# EAGLE board RGB_controller_2zone_v1.00_printable (EAGLE 8.1.0)
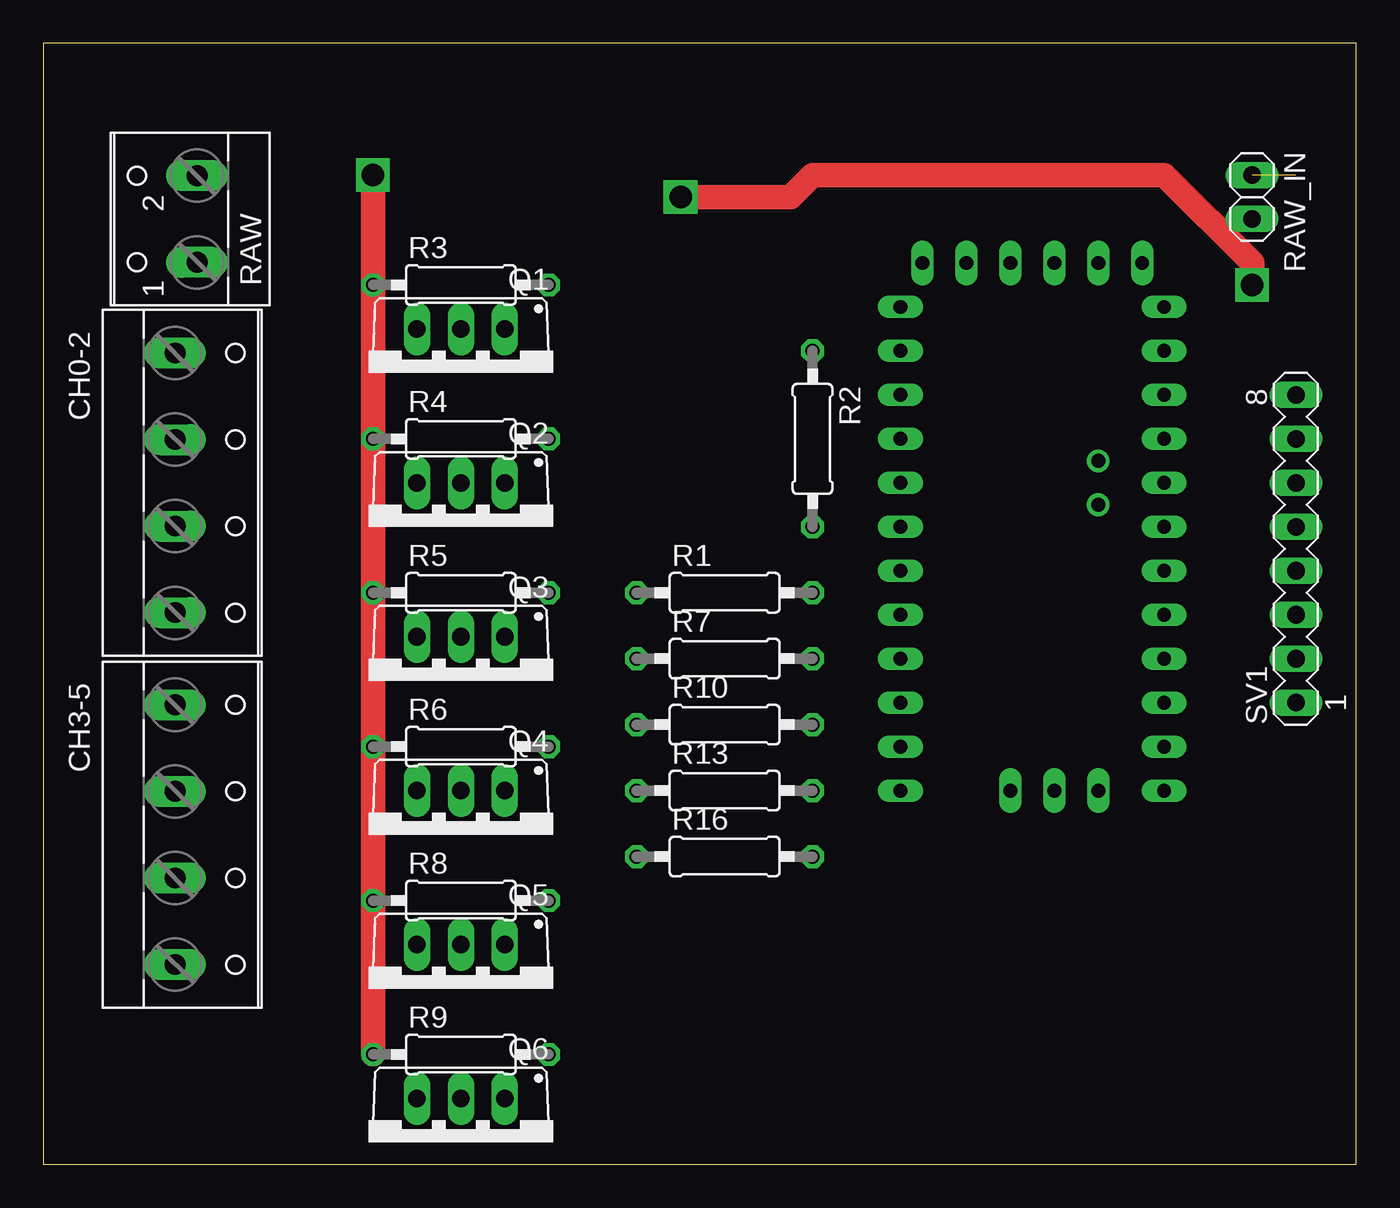
[diagram p0: board, top side]
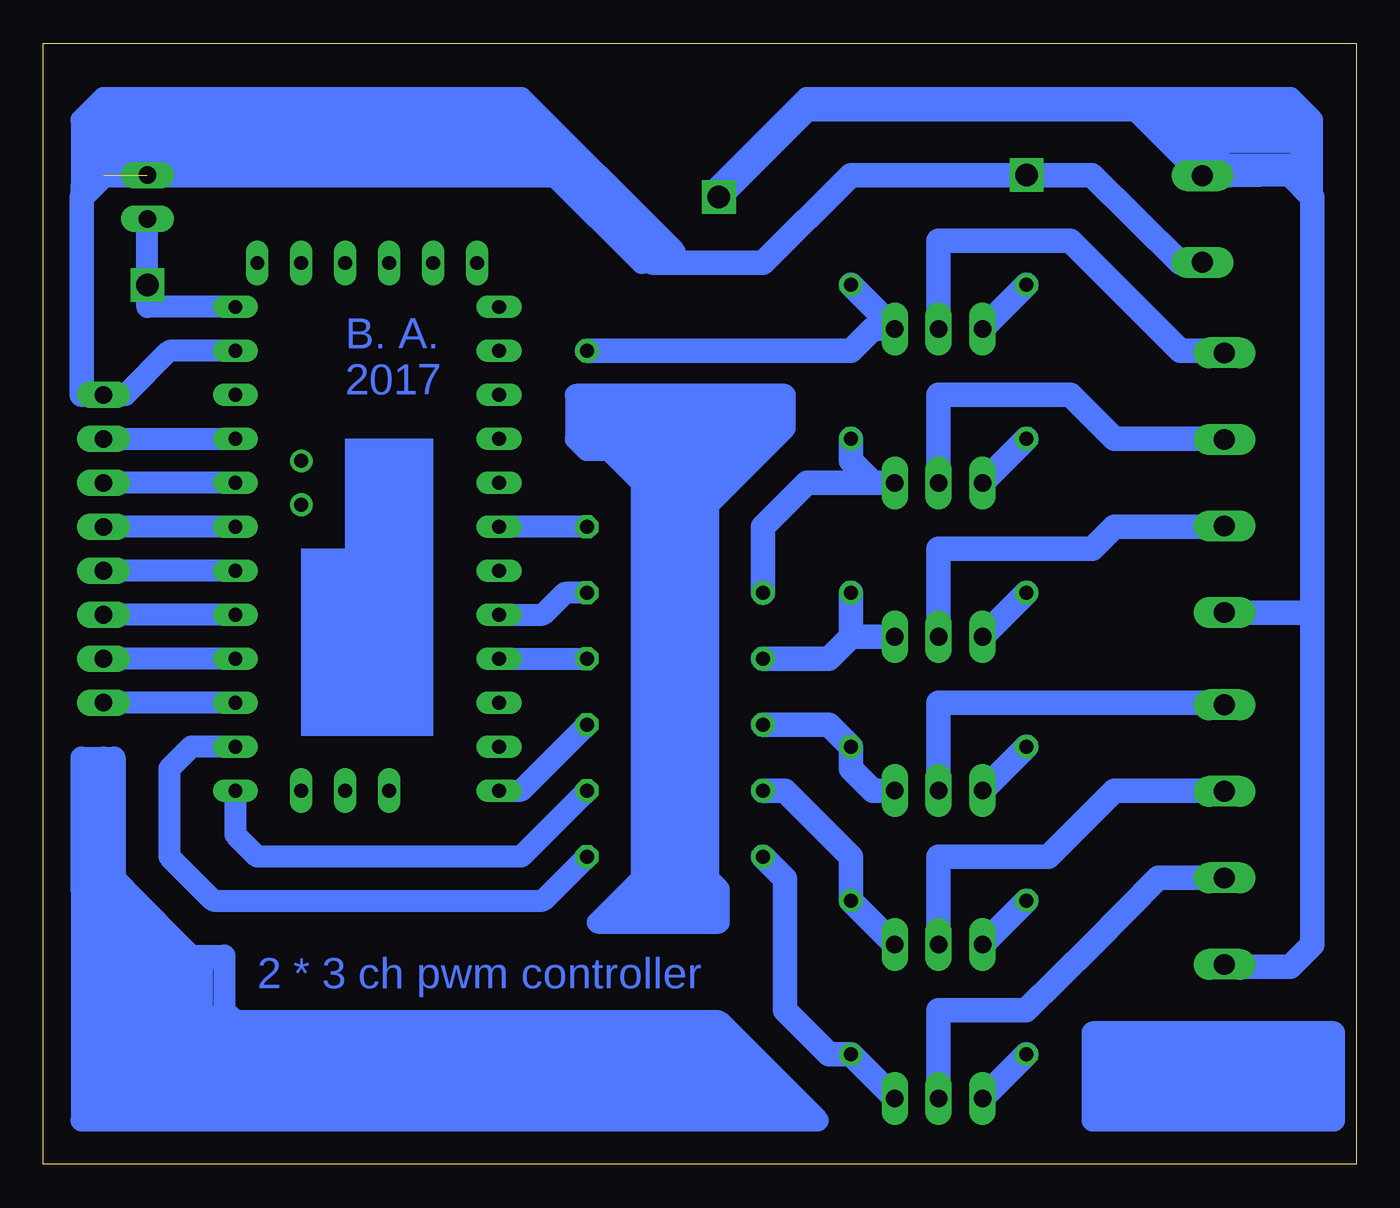
[diagram p1: board, bottom side, seen from below]

Size 75.87 x 64.76 mm. Coordinates in mm from the lower left corner, seen from the top.
Outline: 0,0 75.87,0 75.87,64.76 0,64.76 0,0
Copper layers (1*16): Top 0.035mm / dielectric 1.5mm / Bottom 0.035mm
Design rules "default": minimum track width 10mil, minimum drill 24mil, track to track 8mil, track to pad 8mil, pad to pad 8mil, via to via 8mil, smd to smd 8mil, copper to edge 40mil, drill to drill 8mil, minimum pad ring 10mil, minimum via ring 8mil, stop-mask expansion 4mil, vias tented up to drill 0mil, thermal gap 10mil

## Footprints (pad centres in the part's own frame; a part is rotated, then mirrored left to right if it is on the bottom)
W237-4 = drill 1.194 long: 1 -7.5,-1.27; 2 -2.5,-1.27; 3 2.5,-1.27; 4 7.5,-1.27
TO220BV = drill 1.016 long: D 0,-2.54; G -2.54,-2.54; S 2.54,-2.54
0207/10 = drill 0.813 octagon: 1 -5.08,0; 2 5.08,0
W237-102 = drill 1.194 long: 1 -2.5,-1.27; 2 2.5,-1.27
1X02 = drill 1.016 long: 1 -1.27,0; 2 1.27,0
MA08-1 = drill 1.016 long: 1 -8.89,0; 2 -6.35,0; 3 -3.81,0; 4 -1.27,0; 5 1.27,0; 6 3.81,0; 7 6.35,0; 8 8.89,0
ABK-PRO-MINI = drill 0.8 long: A0 10.16,-3.81; A1 10.16,-6.35; A2 10.16,-8.89; A3 10.16,-11.43; A6 3.81,-21.59; A7 6.35,-21.59; D2 -5.08,-3.81; D3 -5.08,-6.35; D4 -5.08,-8.89; D5 -5.08,-11.43; D6 -5.08,-13.97; D7 -5.08,-16.51; D8 -5.08,-19.05; D9 -5.08,-21.59; D10 10.16,-21.59; D11 10.16,-19.05; D12 10.16,-16.51; D13 10.16,-13.97; DTR 8.89,8.89; GND 10.16,3.81; GND1 -5.08,-1.27; GND2 -3.81,8.89; GND3 -1.27,8.89; GND4 1.27,-21.59; RAW 10.16,6.35; RST 10.16,1.27; RST1 -5.08,1.27; RX1 -5.08,3.81; RX1-1 3.81,8.89; TX0 -5.08,6.35; TX0-1 6.35,8.89; VCC 10.16,-1.27; VCC1 1.27,8.89 | drill 0.8: A4 6.35,-5.08; A5 6.35,-2.54

## Placement (x,y rotation side)
CH0-2  [W237-4]  8.89,39.37 270 top
CH3-5  [W237-4]  8.89,19.05 270 top
Q1  IRF512  [TO220BV]  24.13,45.72 180 top
Q2  IRF512  [TO220BV]  24.13,36.83 180 top
Q3  IRF512  [TO220BV]  24.13,27.94 180 top
Q4  IRF512  [TO220BV]  24.13,19.05 180 top
Q5  IRF512  [TO220BV]  24.13,10.16 180 top
Q6  IRF512  [TO220BV]  24.13,1.27 180 top
R1  1k  [0207/10]  39.37,33.02 0 top
R2  1k  [0207/10]  44.45,41.91 270 top
R3  10k  [0207/10]  24.13,50.8 0 top
R4  10k  [0207/10]  24.13,41.91 0 top
R5  10k  [0207/10]  24.13,33.02 0 top
R6  10k  [0207/10]  24.13,24.13 0 top
R7  1k  [0207/10]  39.37,29.21 0 top
R8  10k  [0207/10]  24.13,15.24 0 top
R9  10k  [0207/10]  24.13,6.35 0 top
R10  1k  [0207/10]  39.37,25.4 0 top
R13  1k  [0207/10]  39.37,21.59 0 top
R16  1k  [0207/10]  39.37,17.78 0 top
RAW  [W237-102]  7.62,54.61 90 top
RAW_IN  [1X02]  69.85,55.88 270 top
SV1  [MA08-1]  72.39,35.56 90 top
U$1  ABK-PRO-MINI  [ABK-PRO-MINI]  54.61,43.18 0 top

## Library data of the parts
CH0-2 CH3-5 = con-wago-500; OC_FARNELL: unknown; OC_NEWARK: unknown
Q1-Q6 = transistor-power
R1-R10 R13 R16 = rcl
RAW = con-wago-500; MPN: 237-102; OC_FARNELL: unknown; OC_NEWARK: 70K9898
RAW_IN = pinhead
SV1 = con-lstb; OC_FARNELL: unknown; OC_NEWARK: unknown
U$1 = Arduino-clone

## Nets
+12V: CH0-2.4 CH3-5.4 RAW.2 RAW_IN.2 U$1.RAW
A0: SV1.6 U$1.A0
A1: SV1.5 U$1.A1
A2: SV1.4 U$1.A2
A3: SV1.3 U$1.A3
D12: SV1.1 U$1.D12
D13: SV1.2 U$1.D13
GATE_1: Q1.G R2.1 R3.2
GATE_2: Q2.G R1.1 R4.2
GATE_3: Q3.G R5.2 R7.1
GATE_4: Q4.G R6.2 R10.1
GATE_5: Q5.G R8.2 R13.1
GATE_6: Q6.G R9.2 R16.1
GND: Q1.S Q2.S Q3.S Q4.S Q5.S Q6.S R3.1 R4.1 R5.1 R6.1 R8.1 R9.1 RAW.1 RAW_IN.1 SV1.8 U$1.GND
IC_PWM_OUT_0: R2.2 U$1.D3
IC_PWM_OUT_1: R1.2 U$1.D5
IC_PWM_OUT_2: R7.2 U$1.D6
IC_PWM_OUT_3: R10.2 U$1.D9
IC_PWM_OUT_4: R13.2 U$1.D10
IC_PWM_OUT_5: R16.2 U$1.D11
OUTPUT_0: CH0-2.1 Q1.D
OUTPUT_1: CH0-2.2 Q2.D
OUTPUT_2: CH0-2.3 Q3.D
OUTPUT_3: CH3-5.1 Q4.D
OUTPUT_4: CH3-5.2 Q5.D
OUTPUT_5: CH3-5.3 Q6.D
VCC: SV1.7 U$1.VCC

## Tracks (layer width: path | path; a pad name or v marks a point on that pad's centre or on a via)
+12V  (via drill 1.3)
  Top 1.422: v36.83,55.88 43.18,55.88 44.45,57.15 64.77,57.15 69.85,52.07 v69.85,50.8
  Bottom 1.27: RAW_IN.2 v69.85,50.8 69.85,49.53 U$1.RAW | 2.54,55.88 2.54,60.33 3.81,61.59 31.75,61.59 36.83,56.52 36.2,56.52 31.75,60.96 10.79,60.96 10.16,60.33 | 10.16,60.33 7.62,57.78 3.17,57.78 3.17,59.69 4.45,60.96 9.53,60.96 10.16,60.33 | 10.16,60.33 5.08,60.33 3.81,59.05 6.99,59.05 | 6.99,59.05 8.26,59.05 8.89,59.69 7.62,59.69 6.99,59.05
  Bottom 1.422: 2.54,31.75 2.54,55.88 3.85,57.19 RAW.2 8.89,57.15 12.7,60.96 31.75,60.96 v36.83,55.88 | 2.54,31.75 2.54,12.7 3.81,11.43 7.5,11.43 CH3-5.4 | CH0-2.4 2.66,31.87 2.54,31.75
A0
  Bottom 1.27: U$1.A0 SV1.6
A1
  Bottom 1.27: U$1.A1 SV1.5
A2
  Bottom 1.27: U$1.A2 SV1.4
A3
  Bottom 1.27: U$1.A3 SV1.3
D12
  Bottom 1.27: U$1.D12 SV1.1
D13
  Bottom 1.27: U$1.D13 SV1.2
GATE_1
  Bottom 1.422: R3.2 Q1.G 27.94,48.26 29.21,46.99 R2.1
GATE_2
  Bottom 1.422: R4.2 29.21,40.64 27.94,39.37 | 27.94,39.37 Q2.G | R1.1 34.29,36.83 31.75,39.37 27.94,39.37
GATE_3
  Bottom 1.422: R7.1 30.48,29.21 29.21,30.48 | 29.21,30.48 Q3.G | R5.2 29.21,30.48
GATE_4
  Bottom 1.422: R10.1 30.48,25.4 R6.2 29.21,22.86 27.94,21.59 Q4.G
GATE_5
  Bottom 1.422: R13.1 33.02,21.59 29.21,17.78 R8.2 Q5.G
GATE_6
  Bottom 1.422: Q6.G R9.2 30.48,6.35 33.02,8.89 33.02,16.51 R16.1
GND  (via drill 1.3)  (1 unrouted)
  Top 1.422: R9.1 R8.1 R6.1 R5.1 R4.1 R3.1 v19.05,57.15
  Bottom 1.27: 73.66,44.45 SV1.8 71.12,44.45 68.58,46.99 U$1.GND | 44.45,57.78 44.45,57.15 39.37,52.07 39.37,52.7 48.26,61.59 72.39,61.59 73.66,60.33 73.66,56.52 | 73.66,55.88 73.66,56.52 | 73.66,56.52 72.39,57.78 72.39,60.96 48.9,60.96 48.9,57.78 45.72,57.78 48.26,60.33 48.26,58.42 46.99,58.42 | 40.64,52.07 41.27,52.07 46.35,57.15
  Bottom 1.422: Q1.S R3.1 | Q4.S R6.1 | Q5.S R8.1 | Q6.S R9.1 | Q3.S R5.1 | Q2.S R4.1 | RAW.1 10.16,52.11 10.16,52.07 15.28,57.15 v19.05,57.15 29.21,57.15 34.29,52.07 39.37,52.07 40.64,52.07 44.45,57.15 46.35,57.15 72.39,57.15 73.66,55.88 73.66,44.45
IC_PWM_OUT_0
  Bottom 1.27: R2.2 U$1.D3
IC_PWM_OUT_1
  Bottom 1.27: R1.2 45.72,33.02 46.99,31.75 U$1.D5
IC_PWM_OUT_2
  Bottom 1.27: U$1.D6 R7.2
IC_PWM_OUT_3
  Bottom 1.27: 48.26,21.59 R10.2 48.26,21.59 | U$1.D9 48.26,21.59
IC_PWM_OUT_4
  Bottom 1.27: R13.2 48.26,17.78 63.5,17.78 64.77,19.05 U$1.D10
IC_PWM_OUT_5
  Bottom 1.27: R16.2 46.99,15.24 66.04,15.24 68.58,17.78 68.58,22.86 67.31,24.13 U$1.D11
N$1
  Bottom 1.27: 38.1,38.1 37.47,38.1 33.02,42.55 33.02,44.45 45.09,44.45 45.09,41.91 44.45,41.27 43.18,41.27 41.27,39.37 37.47,39.37 33.66,43.18 34.29,43.81
N$2
  Bottom 1.27: 36.83,14.61 36.83,13.97 43.81,13.97 40.64,17.14 38.1,17.14 36.83,15.88 36.83,14.61 | 36.83,14.61 42.55,14.61
N$3
  Bottom 1.27: 71.12,15.88 67.31,12.06 65.41,12.06 65.41,8.89 64.77,8.26 66.04,8.26 66.67,8.89 66.67,11.43 67.94,11.43 70.48,13.97 70.48,13.34 67.31,10.16 67.31,8.89 67.94,8.89 | 72.39,15.88 73.66,15.88 | 73.66,15.88 73.66,2.54 31.11,2.54 36.83,8.26 37.47,8.26 32.38,3.17 33.66,3.17 36.83,6.35 36.83,4.45 | 67.94,8.89 69.85,8.89 70.48,9.53 70.48,11.43 | 70.48,12.06 70.48,11.43 | 69.85,10.79 67.94,8.89 | 67.94,8.89 67.94,10.16 68.58,10.79 69.85,10.79 | 69.85,10.79 70.48,11.43 | 70.48,11.43 69.22,11.43 69.22,10.16 69.85,9.53 | 73.66,15.88 73.66,23.5 72.39,23.5 | 72.39,23.5 71.75,23.5 71.75,16.51 71.12,15.88 | 71.12,15.88 72.39,15.88 | 72.39,15.88 73.03,16.51 73.03,22.86 72.39,23.5 | 73.03,15.24 71.75,15.24 | 71.75,15.24 71.12,15.24 | 72.39,23.5 72.39,15.88 | 72.39,15.88 71.75,15.24
N$5
  Bottom 1.27: 15.24,7.62 15.24,2.54 1.27,2.54 1.27,7.62 15.24,7.62
OUTPUT_0
  Bottom 1.422: Q1.D 24.13,53.34 16.51,53.34 10.16,46.99 7.74,46.99 CH0-2.1
OUTPUT_1
  Bottom 1.422: Q2.D 24.13,44.45 16.51,44.45 13.97,41.91 7.66,41.91 CH0-2.2
OUTPUT_2
  Bottom 1.422: Q3.D 24.13,35.56 15.24,35.56 13.97,36.83 7.66,36.83 CH0-2.3
OUTPUT_3
  Bottom 1.422: Q4.D 24.13,26.67 7.74,26.67 CH3-5.1
OUTPUT_4
  Bottom 1.422: Q5.D 24.13,17.78 17.78,17.78 13.97,21.59 7.66,21.59 CH3-5.2
OUTPUT_5
  Bottom 1.422: Q6.D 24.13,8.89 19.09,8.89 15.24,12.7 11.43,16.55 CH3-5.3
VCC
  Bottom 1.27: SV1.7 U$1.VCC
(copper drawn outside any net)
  shapes: Bottom area x10

## Text on the board
Bottom: B. A. / 2017 | 2 * 3 ch pwm controller